# EAGLE board M_3x4._v4.1 (EAGLE 9.6.2)
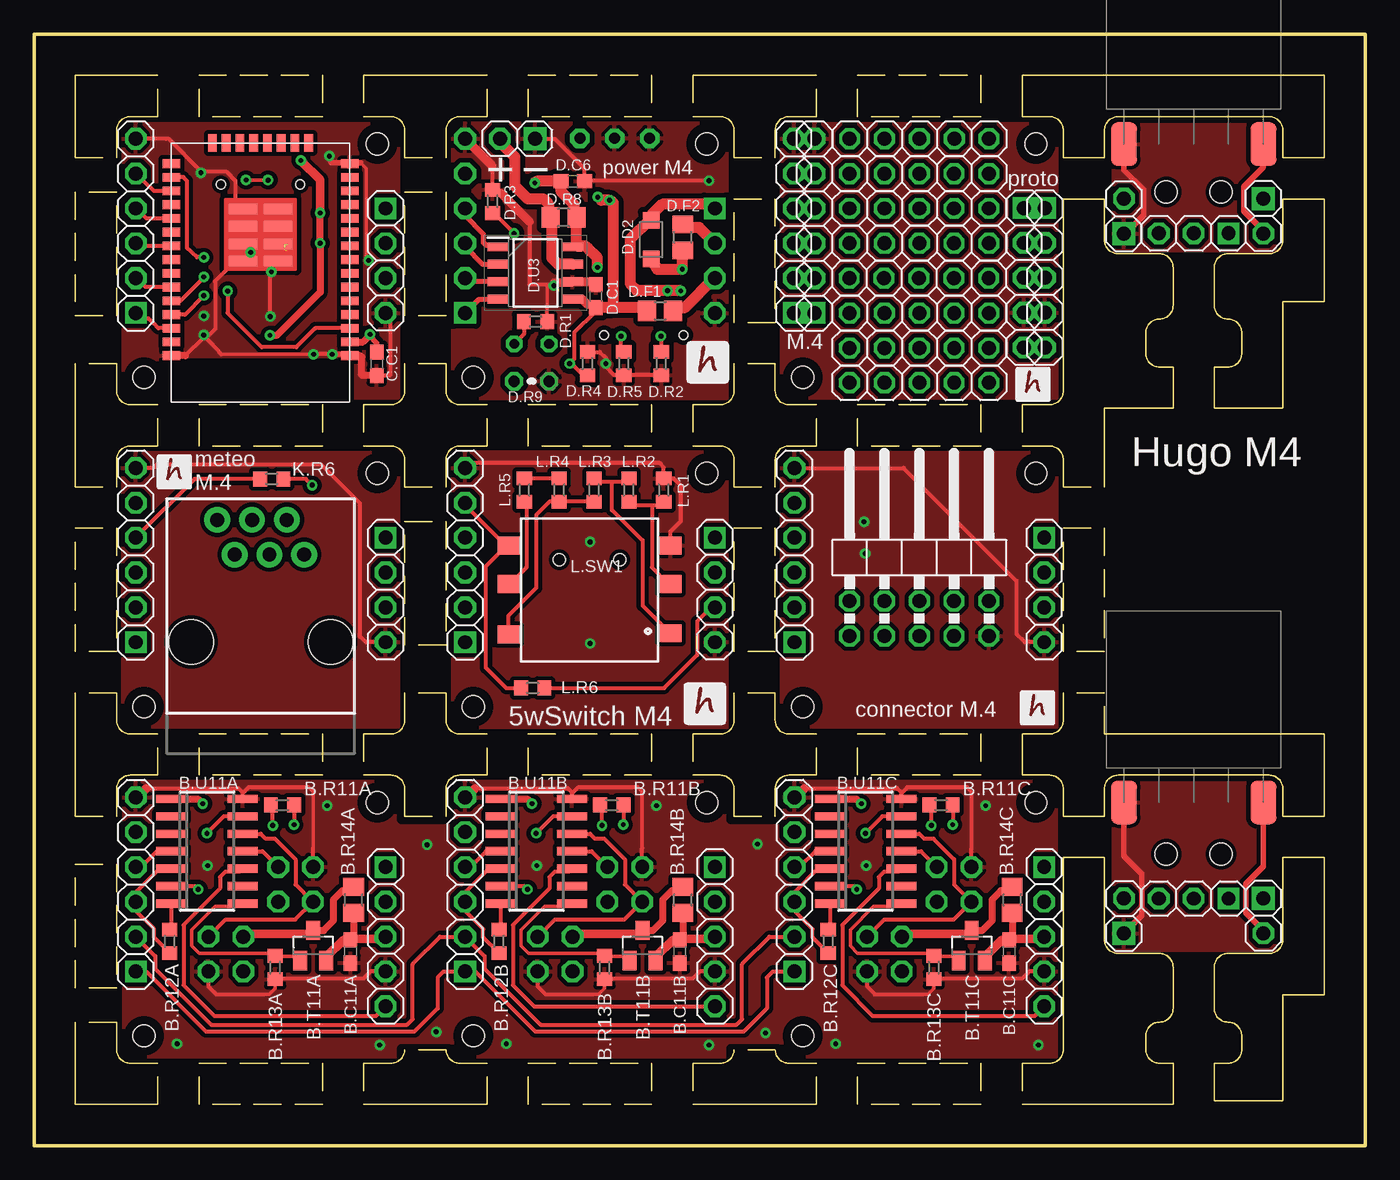
[diagram p0: board, top side]
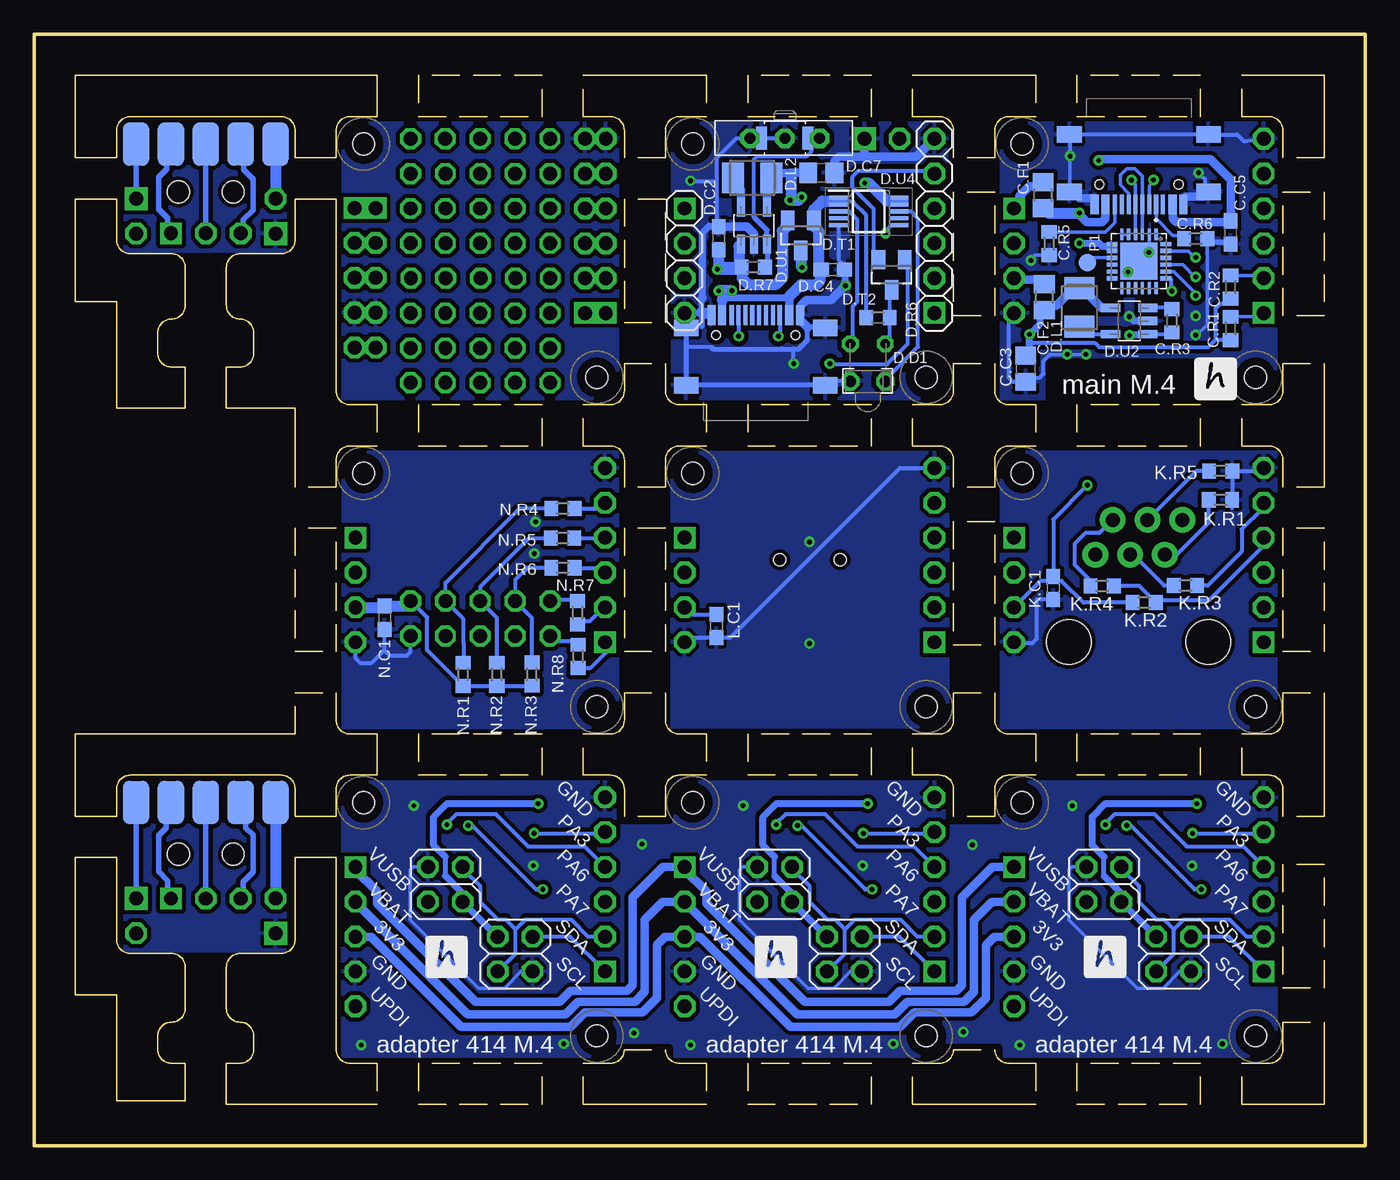
[diagram p1: board, bottom side, seen from below]

Size 97 x 81 mm. Coordinates in mm from the lower left corner, seen from the top.
Outline: 0,0 97,0 97,81 0,81 0,0
Copper layers (1*16): Top 0.035mm / dielectric 1.5mm / Bottom 0.035mm
Design rules "default *": minimum track width 10mil, minimum drill 0.35mm, track to track 6mil, track to pad 6mil, pad to pad 6mil, via to via 6mil, smd to smd 6mil, copper to edge 0mil, drill to drill 15mil, minimum pad ring 10mil, minimum via ring 8mil, stop-mask expansion 4mil, vias tented up to drill 0mil, thermal gap 10mil
Holes 1.6 mm at 32,56 49,73 73,73 56,56 25,49 8,32 8,8 25,25 32,8 49,25 56,8 73,25 32,32 49,49 82.5,69.5 86.5,69.5 73,49 56,32 82.5,21.25 86.5,21.25 8,56 25,73
tRestrict: area 48,72 to 50,74; area 31,55 to 33,57; area 72,72 to 74,74; area 55,55 to 57,57; area 24,48 to 26,50; area 7,31 to 9,33; area 24,24 to 26,26; area 7,7 to 9,9; area 48,24 to 50,26; area 31,7 to 33,9; area 72,24 to 74,26; area 55,7 to 57,9; 10 more areas
bRestrict: area 31,55 to 33,57; area 48,72 to 50,74; area 55,55 to 57,57; area 72,72 to 74,74; area 7,31 to 9,33; area 24,48 to 26,50; area 24,24 to 26,26; area 7,7 to 9,9; area 48,24 to 50,26; area 31,7 to 33,9; area 72,24 to 74,26; area 55,7 to 57,9; 10 more areas
Milling: 439 lines

## Footprints (pad centres in the part's own frame; a part is rotated, then mirrored left to right if it is on the bottom)
C0603 = smd 1.1 x 1: 1 -0.85,0; 2 0.85,0
1X06 = drill 1.016 pad 1.575 square: 1 -6.35,0 | drill 1.016 pad 1.575 octagon: 2 -3.81,0; 3 -1.27,0; 4 1.27,0; 5 3.81,0; 6 6.35,0
2X02 = drill 1.016 pad 1.575 octagon: 1 -1.27,-1.27; 2 -1.27,1.27; 3 1.27,-1.27; 4 1.27,1.27
1X05 = drill 1.016 pad 1.575 square: 1 -5.08,0 | drill 1.016 pad 1.575 octagon: 2 -2.54,0; 3 0,0; 4 2.54,0; 5 5.08,0
R0603 = smd 1 x 1.1: 1 -0.85,0; 2 0.85,0
FUSE = smd 1.3 x 1.5: 1 -0.95,0; 2 0.95,0
SO23 = smd 1 x 1.4: D 0,1.1; G -0.95,-1.1; S 0.95,-1.1
SO14 = smd 0.6 x 2.2: 1 -3.81,-2.6; 2 -2.54,-2.6; 3 -1.27,-2.6; 4 0,-2.6; 5 1.27,-2.6; 6 2.54,-2.6; 7 3.81,-2.6; 8 3.81,2.6; 9 2.54,2.6; 10 1.27,2.6; 11 0,2.6; 12 -1.27,2.6; 13 -2.54,2.6; 14 -3.81,2.6
C0805 = smd 1.3 x 1.5: 1 -0.95,0; 2 0.95,0
R0805 = smd 1.3 x 1.5: 1 -0.95,0; 2 0.95,0
TTGO-MICRO-32 = smd 1.27 x 0.635: 3V3 -6.5,5; EN -6.5,4; GND1 -6.5,6; GND2 -6.5,-8; GND3 6.5,6; IO0 6.5,-7; IO2 6.5,-8; IO4 6.5,-6; IO5 6.5,-3; IO12 -6.5,-7; IO14 -6.5,-6; IO16 6.5,-5; IO17 6.5,-4; IO18 6.5,-2; IO19 6.5,-1; IO21 6.5,1; IO22 6.5,4; IO23 6.5,5; IO25 -6.5,-3; IO26 -6.5,-4; IO27 -6.5,-5; IO32 -6.5,-1; IO33 -6.5,-2; IO34 -6.5,1; IO35 -6.5,0; NC 6.5,0; RXD0 6.5,2; TXD0 6.5,3; VN -6.5,2; VP -6.5,3 | smd 0.635 x 1.27: CLK 0.5,-9.5; CMD -0.5,-9.5; IO13 -3.5,-9.5; IO15 3.5,-9.5; SD0 1.5,-9.5; SD1 2.5,-9.5; SD2 -2.5,-9.5; SD3 -1.5,-9.5 | smd 2.032 x 0.762: GND4 -1.27,-0.889; GND5 1.27,-0.889; GND6 -1.27,-2.159; GND7 1.27,-2.159; GND8 -1.27,-3.429; GND9 -1.27,-4.699; GND10 1.27,-3.429; GND11 1.27,-4.699
LED_1.8 = drill 0.7 octagon: 1 -1.27,-0.4; 2 1.27,-0.4
SHOTKY_2.8 = smd 1.2 x 1.2: A -1.4,0; K 1.4,0
1X04 = drill 1.016 pad 1.575 square: 1 -3.81,0 | drill 1.016 pad 1.575 octagon: 2 -1.27,0; 3 1.27,0; 4 3.81,0
L3230M = smd 1.6 x 2.2: 1 -1.4,0; 2 1.4,0
1X02 = drill 1.016 pad 1.676 square: 1 -1.27,0 | drill 1.016 pad 1.575 octagon: 2 1.27,0
SWITCH = drill 0.8 pad 1.422 octagon: P$1 -2.54,0; P$2 0,0; P$3 2.54,0 | smd 0.8 x 1.7: P$4 -1.7,0; P$5 1.7,0
THERM = drill 0.813 octagon: 1 -1.27,0; 2 1.27,0
SOT32-5 = smd 0.6 x 1.4: BP 0.95,1.35; GND 0,-1.35; SHDN 0.95,-1.35; VIN -0.95,-1.35; VOUT -0.95,1.35
SOIC127P600X175-8N = smd 1.528 x 0.65: 1 -2.711,1.905; 2 -2.711,0.635; 3 -2.711,-0.635; 4 -2.711,-1.905; 5 2.711,-1.905; 6 2.711,-0.635; 7 2.711,0.635; 8 2.711,1.905
SOP50P490X110-10N = smd 1.4 x 0.3: 1 -2.2,1; 2 -2.2,0.5; 3 -2.2,0; 4 -2.2,-0.5; 5 -2.2,-1; 6 2.2,-1; 7 2.2,-0.5; 8 2.2,0; 9 2.2,0.5; 10 2.2,1
RJ11-6 = drill 1.016 pad 1.88: 1 -3.175,8.89; 2 -1.905,6.35; 3 -0.635,8.89; 4 0.635,6.35; 5 1.905,8.89; 6 3.175,6.35 | hole 3.251: -5.08,0; 5.08,0
1X03 = drill 1.016 pad 1.575 square: 1 -2.54,0 | drill 1.016 pad 1.575 octagon: 2 0,0; 3 2.54,0
2X05/90 = drill 1.016 octagon: 1 -5.08,-6.35; 2 -5.08,-3.81; 3 -2.54,-6.35; 4 -2.54,-3.81; 5 0,-6.35; 6 0,-3.81; 7 2.54,-6.35; 8 2.54,-3.81; 9 5.08,-6.35; 10 5.08,-3.81
5_WAY_SWITCH = smd 1.6 x 1.3: 1 -6,3; 2 -6,0.2; 3 -6,-3.5; 4 5.8,3; 5 5.8,0.2; 6 5.8,-3.4 | hole 0.9: 2.1,1.95; -2.3,1.95
B1,27 = smd 1.27 x 1.27: TP 0,0
QFN50P400X400X80-25N = smd 0.81 x 0.26: 1 -1.955,1.25; 2 -1.955,0.75; 3 -1.955,0.25; 4 -1.955,-0.25; 5 -1.955,-0.75; 6 -1.955,-1.25; 13 1.955,-1.25; 14 1.955,-0.75; 15 1.955,-0.25; 16 1.955,0.25; 17 1.955,0.75; 18 1.955,1.25 | smd 0.26 x 0.81: 7 -1.25,-1.955; 8 -0.75,-1.955; 9 -0.25,-1.955; 10 0.25,-1.955; 11 0.75,-1.955; 12 1.25,-1.955; 19 1.25,1.955; 20 0.75,1.955; 21 0.25,1.955; 22 -0.25,1.955; 23 -0.75,1.955; 24 -1.25,1.955 | smd 2.68 x 2.68: 25 0,0
USB-C = smd 0.6 x 1.45: A1B12 -3.235,3.825; A4B9 -2.46,3.825; B1A12 3.215,3.825; B4A9 2.44,3.825 | smd 0.3 x 1.45: A5 -1.26,3.825; A6 -0.26,3.825; A7 0.24,3.825; A8 1.24,3.825; B5 1.74,3.825; B6 0.74,3.825; B7 -0.76,3.825; B8 -1.76,3.825 | smd 1.8 x 1.2: SH1 -5.08,2.91; SH2 -5.08,-1.27; SH3 5.06,-1.27; SH4 5.06,2.91 | hole 0.65: 2.88,2.38; -2.9,2.38
1X5_AUTO = drill 1.016 octagon: 1 -5.08,0; 2 -2.54,0; 3 0,0; 4 2.54,0; 5 5.08,0
7PIN_CONNECTOR = smd 3.175 x 1.905: 1 0,5.08; 7 0,-5.08 | smd 3.175 x 1.905 bottom: 2 0,5.08; 3 0,2.54; 4 0,0; 5 0,-2.54; 6 0,-5.08

## Placement (x,y rotation side)
B.C11A  100n  [C0603]  23.04,14.15 270 top
B.C11B  100n  [C0603]  47.04,14.15 270 top
B.C11C  100n  [C0603]  71.04,14.15 270 top
B.J1  [1X06]  31.4,19.04 90 top
B.J2  [2X02]  37.96,13.96 270 bottom
B.J3  [2X02]  43.04,19.04 270 bottom
B.J4  [1X05]  49.6,15.23 270 top
B.J5  [1X06]  55.4,19.04 90 top
B.J6  [2X02]  61.96,13.96 270 bottom
B.J7  [2X02]  67.04,19.04 270 bottom
B.J8  [1X05]  73.6,15.23 270 top
B.J11  [1X05]  25.6,15.23 270 top
B.J12  [1X06]  7.4,19.04 90 top
B.J13  [2X02]  13.96,13.96 270 bottom
B.J14  [2X02]  19.04,19.04 270 bottom
B.R11A  alt RX 0R  [R0603]  18.09,24.82 180 top
B.R11B  alt RX 0R  [R0603]  42.09,24.82 180 top
B.R11C  alt RX 0R  [R0603]  66.09,24.82 180 top
B.R12A  alt TX 0R  [R0603]  9.86,14.89 90 top
B.R12B  alt TX 0R  [R0603]  33.86,14.89 90 top
B.R12C  alt TX 0R  [R0603]  57.86,14.89 90 top
B.R13A  100k  [R0603]  17.56,12.98 270 top
B.R13B  100k  [R0603]  41.56,12.98 270 top
B.R13C  100k  [R0603]  65.56,12.98 270 top
B.R14A  alt fuse or 0R  [FUSE]  23.27,17.9 90 top
B.R14B  alt fuse or 0R  [FUSE]  47.27,17.9 90 top
B.R14C  alt fuse or 0R  [FUSE]  71.27,17.9 90 top
B.T11A  NX3008  [SO23]  20.33,14.59 0 top
B.T11B  NX3008  [SO23]  44.33,14.59 0 top
B.T11C  NX3008  [SO23]  68.33,14.59 0 top
B.U11A  AT414  [SO14]  12.59,21.45 270 top
B.U11B  AT414  [SO14]  36.59,21.45 270 top
B.U11C  AT414  [SO14]  60.59,21.45 270 top
C.C1  100n  [C0603]  24.96,56.98 270 top
C.C3  22u  [C0805]  24.75,56.62 270 bottom
C.C5  1u  [C0603]  9.81,66.55 90 bottom
C.F1  0.5A  [R0805]  23.48,69.28 90 bottom
C.F2  0.5A  [R0805]  23.38,61.85 90 bottom
C.J2  [1X06]  7.4,67.04 90 top
C.R1  2k2  [R0603]  9.81,59.56 270 bottom
C.R2  2k2  [R0603]  9.81,62.58 270 bottom
C.R3  100k  [R0603]  14.08,60.12 270 bottom
C.R5  5K1  [R0603]  23.03,65.76 90 bottom
C.R6  5k1  [R0603]  12.35,66.11 180 bottom
C.U1  TTGO-MICRO-32  [TTGO-MICRO-32]  16.49,63.58 180 top
D.C1  100n  [C0603]  40.92,61.92 270 top
D.C2  4u7  [C0603]  47.12,66.14 270 bottom
D.C4  4u7  [C0603]  38.8,63.85 180 bottom
D.C6  4u7  [C0603]  39.25,70.29 180 top
D.C7  10u  [C0805]  39.64,70.9 180 bottom
D.D1  LED_1.8_FLIPPED  [LED_1.8]  36.25,58.05 180 bottom
D.D2  SHOTKY_2.8  [SHOTKY_2.8]  44.96,66.04 270 top
D.F1  0.5A  [R0805]  45.61,60.85 0 top
D.F2  1.1A  [R0805]  47.26,66.2 90 top
D.J2  [1X06]  31.4,67.04 90 bottom
D.J3  [1X04]  49.6,64.5 270 bottom
D.L1  2u2  [L3230M]  20.83,61.09 90 bottom
D.L2  2u2  [L3230M]  44.68,70.54 0 bottom
D.LIPOL  [1X02]  35.21,73.39 180 top
D.ON/OFF/RESET  SWITCH  [SWITCH]  42.3,73.42 0 bottom
D.R1  4k7  [R0603]  36.53,60.05 180 top
D.R2  5k1  [R0603]  45.7,57 270 top
D.R3  I=1/R (4k7 for 213mA, 2k2 for455mA )  [R0603]  33.4,68.81 270 top
D.R4  100k  [R0603]  40.31,57 90 top
D.R5  5k1  [R0603]  42.96,57 270 top
D.R6  3k3  [R0603]  35.51,60.35 180 bottom
D.R7  390k  [R0603]  44.6,64.03 0 bottom
D.R8  0.1  [R0805]  38.58,67.64 180 top
D.R9  TERM_10K  [THERM]  36.25,55.71 180 top
D.T1  FDV304  [SO23]  41.13,66.34 180 bottom
D.T2  NX3008  [SO23]  34.52,63.47 180 bottom
D.U1  LM3671_3.3  [SOT32-5]  44.54,67.05 0 bottom
D.U2  LM3671_3.3  [SOT32-5]  17.2,60.11 90 bottom
D.U3  INA219AIDR  [SOIC127P600X175-8N]  36.53,63.6 0 top
D.U4  MCP73833-AMI_UN  [SOP50P490X110-10N]  36.17,68.09 0 bottom
G.J1  [1X06]  31.4,43.04 90 top
G.J2  [1X04]  49.6,40.5 270 top
I.J1  [1X04]  73.6,40.5 270 top
I.J3  [1X04]  25.6,40.5 270 top
J1  RJ11  [RJ11-6]  16.5,36.72 0 top
JP1  [1X04]  25.6,64.5 270 top
JP2  [1X06]  55.35,67.04 90 top
JP3  [1X06]  56.87,67.04 90 top
JP4  [1X05]  72.13,63.26 270 top
JP5  [1X06]  7.4,43.04 90 top
JP6  [1X03]  84.5,66.5 180 top
JP7  [1X02]  79.42,67.75 90 top
JP8  [1X02]  89.58,67.75 270 top
JP9  [1X06]  55.4,43.04 90 top
JP10  [2X05/90]  64.5,43.5 0 top
JP11  [1X05]  73.65,63.26 270 top
JP12  [1X03]  84.5,18 180 top
JP13  [1X02]  79.42,16.75 90 top
JP14  [1X02]  89.58,16.75 270 top
K.C1  100n  [C0603]  22.74,40.64 270 bottom
K.R1  1k  [R0603]  10.55,47.07 180 bottom
K.R2  4k7  [R0603]  16.11,39.58 0 bottom
K.R3  1k  [R0603]  13.1,40.82 180 bottom
K.R4  1k  [R0603]  19.17,40.8 180 bottom
K.R5  1k  [R0603]  10.54,49.18 180 bottom
K.R6  4k7  [R0603]  17.3,48.59 180 top
L.C1  100n  [C0603]  47.27,37.87 90 bottom
L.R1  1k  [R0603]  45.88,47.78 90 top
L.R2  1k  [R0603]  43.34,47.78 270 top
L.R3  2k2  [R0603]  40.8,47.78 90 top
L.R4  2k2  [R0603]  38.26,47.78 270 top
L.R5  2k2  [R0603]  35.72,47.78 270 top
L.R6  2k2  [R0603]  36.32,33.35 0 top
L.SW1  5_WAY_SWITCH  [5_WAY_SWITCH]  40.57,40.74 0 top
N.C1  100n  [C0603]  71.46,38.47 270 bottom
N.R1  4k7  [R0603]  65.75,34.35 90 bottom
N.R2  4k7  [R0603]  63.29,34.35 90 bottom
N.R3  4k7  [R0603]  60.74,34.37 90 bottom
N.R4  4k7  [R0603]  58.47,46.43 180 bottom
N.R5  4k7  [R0603]  58.5,44.27 180 bottom
N.R6  4k7  [R0603]  58.47,42.12 180 bottom
N.R7  4k7  [R0603]  57.4,38.84 90 bottom
N.R8  4k7  [R0603]  57.38,35.66 90 bottom
P1  TPB1,27  [B1,27]  20.24,64.37 0 bottom
U1  CP2104-F03-GM  [QFN50P400X400X80-25N]  16.49,64.46 270 bottom
U$1  USB-C  [USB-C]  16.5,72.43 180 bottom
U$2  USB-C  [USB-C]  44.41,56.7 0 bottom
U$3  PINHD-1X5_AUTO  [1X5_AUTO]  64.51,73.39 0 top
U$4  PINHD-1X5_AUTO  [1X5_AUTO]  64.5,70.85 0 top
U$5  PINHD-1X5_AUTO  [1X5_AUTO]  64.5,68.31 0 top
U$6  PINHD-1X5_AUTO  [1X5_AUTO]  64.5,65.77 0 top
U$7  PINHD-1X5_AUTO  [1X5_AUTO]  64.47,63.23 0 top
U$8  PINHD-1X5_AUTO  [1X5_AUTO]  64.5,60.69 0 top
U$9  PINHD-1X5_AUTO  [1X5_AUTO]  64.5,58.14 0 top
U$10  PINHD-1X5_AUTO  [1X5_AUTO]  64.5,55.6 0 top
U$11  7PIN_CONNECTOR  [7PIN_CONNECTOR]  84.5,73 270 top
U$12  7PIN_CONNECTOR  [7PIN_CONNECTOR]  84.5,25 270 top

## Library data of the parts
B.C11A B.C11B B.C11C C.C1 C.C3 C.C5 D.C1 D.C2 D.C4 D.C6 D.C7 K.C1 L.C1 N.C1 = rcl; SPICEPREFIX: C
B.J1-B.J8 B.J11-B.J14 C.J2 D.J2 D.J3 D.LIPOL G.J1 G.J2 I.J1 I.J3 JP1-JP14 U$3-U$10 = pinhead2
B.R11A B.R11B B.R11C B.R12A B.R12B B.R12C B.R13A B.R13B B.R13C C.F1 C.F2 C.R1-C.R3 C.R5 C.R6 D.F1 D.F2 D.R1-D.R8 K.R1-K.R6 L.R1-L.R6 N.R1-N.R8 = rcl; SPICEPREFIX: R
B.R14A B.R14B B.R14C B.T11A B.T11B B.T11C C.U1 D.D1 D.D2 D.ON/OFF/RESET D.R9 D.T1 D.T2 L.SW1 U$1 U$2 U$11 U$12 = hugo
B.U11A B.U11B B.U11C = atmel
D.L1 D.L2 = rcl; SPICEPREFIX: L
D.U1 D.U2 = !stavebnice03
D.U3 = SamacSys_Parts; DESCRIPTION: 26-V, Bidirectional, Zero-Drift, High-Side, I2C Out Current/Power Monitor; HEIGHT: 1.75mm; MANUFACTURER_NAME: Texas Instruments; MANUFACTURER_PART_NUMBER: INA219AIDR; MOUSER_PART_NUMBER: 595-INA219AIDR; MOUSER_PRICE-STOCK: https://www.mouser.co.uk/ProductDetail/Texas-Instruments/INA219AIDR?qs=XGzIaZb%2FFYIE5YcOHTnKDA%3D%3D
D.U4 = SamacSys_Parts; DESCRIPTION: Microchip MCP73833-AMI/UN, Battery Charge Controller Lithium-Ion, Lithium-Polymer, 10-Pin MSOP; HEIGHT: 1.1mm; MANUFACTURER_NAME: Microchip; MANUFACTURER_PART_NUMBER: MCP73833-AMI/UN; MOUSER_PART_NUMBER: 579-MCP73833-AMI/UN; MOUSER_PRICE-STOCK: https://www.mouser.co.uk/ProductDetail/Microchip-Technology/MCP73833-AMI-UN?qs=Fxu3fLyJv8fd%2FGnsUSC9lg%3D%3D
J1 = SparkFun-Connectors; PROD_ID: CONN-08590; SF_ID: PRT-00132
P1 = testpad
U1 = CP2104; AVAILABILITY: Unavailable; DESCRIPTION: USB Bridge, USB to UART USB 2.0 UART Interface 24-QFN (4x4); MF: Silicon Labs; MP: CP2104; PACKAGE: QFN-24 Silicon Labs; PRICE: None

## Nets
3V3F: D.F1.2 D.J3.3
GND: C.C1.2 C.C3.2 C.C5.1 C.J2.6 C.R5.1 C.R6.1 C.U1.GND1 C.U1.GND2 C.U1.GND3 C.U1.GND4 C.U1.GND5 C.U1.GND6 C.U1.GND7 C.U1.GND8 C.U1.GND9 C.U1.GND10 C.U1.GND11 D.U2.GND JP1.4 U1.2 U1.25 U$1.A1B12 U$1.B1A12 U$1.SH1 U$1.SH2 U$1.SH3 U$1.SH4
GND1: D.C1.1 D.C2.1 D.C4.1 D.C6.1 D.C7.1 D.J2.6 D.J3.4 D.LIPOL.1 D.ON/OFF/RESET.P$1 D.ON/OFF/RESET.P$2 D.ON/OFF/RESET.P$4 D.R1.1 D.R2.2 D.R3.1 D.R4.2 D.R5.2 D.R9.1 D.U1.GND D.U3.6 D.U4.5 U$2.A1B12 U$2.B1A12 U$2.SH1 U$2.SH2 U$2.SH3 U$2.SH4
GND2: JP2.6 JP3.6 JP4.4 JP11.4
GND3: G.J1.6 G.J2.4 L.C1.1 L.R1.2 L.SW1.4
GND4: I.J3.4 JP5.6 K.C1.2 K.R1.1 K.R5.1
GND5: JP7.1 U$11.7
GND6: B.C11A.2 B.C11B.2 B.C11C.2 B.J1.6 B.J2.4 B.J3.1 B.J4.4 B.J5.6 B.J6.4 B.J7.1 B.J8.4 B.J11.4 B.J12.6 B.J13.4 B.J14.1 B.R13A.2 B.R13B.2 B.R13C.2 B.U11A.14 B.U11B.14 B.U11C.14
GND7: I.J1.4 JP9.6 JP10.9 N.C1.2
GND8: JP13.1 U$12.7
IN+: D.LIPOL.2 D.R8.2 D.U3.7
IN-: D.C6.2 D.R8.1 D.T1.D D.U3.8 D.U4.9 D.U4.10
N$1: U1.4 U$1.A7 U$1.B7
N$2: U1.3 U$1.A6 U$1.B6
N$3: C.R6.2 U$1.A5
N$4: C.R5.2 U$1.B5
N$5: C.F2.2 JP1.3
N$6: C.F1.2 JP1.1
N$7: P1.TP U1.9
N$8: U1.5 U1.6
N$9: D.L2.1 D.U1.VOUT
N$10: D.L1.1 D.U2.VOUT
N$11: C.R3.1 D.U2.SHDN
N$12: C.J2.5 C.U1.IO4
N$13: C.J2.4 C.U1.IO17
N$14: C.J2.3 C.U1.IO18
N$15: D.ON/OFF/RESET.P$3 D.ON/OFF/RESET.P$5 D.R7.2 D.U1.SHDN
N$16: D.R5.1 U$2.B5
N$17: D.R2.1 U$2.A5
N$18: D.R3.2 D.U4.6
N$19: D.R9.2 D.U4.8
N$20: D.J2.5 D.T2.S
N$21: JP2.5 JP3.5
N$22: JP2.4 JP3.4
N$24: JP2.3 JP3.3
N$25: JP2.2 JP3.2
N$27: JP2.1 JP3.1
N$28: JP4.5 JP11.5
N$29: JP4.2 JP11.2
N$30: JP4.1 JP11.1
N$31: JP4.3 JP11.3
N$32: L.R1.1 L.R2.2 L.SW1.5
N$33: L.R2.1 L.R3.2 L.SW1.6
N$34: L.R3.1 L.R4.2 L.SW1.3
N$35: L.R5.2 L.SW1.2
N$36: G.J1.5 L.R6.1 L.SW1.1
N$37: L.R4.1 L.R5.1
N$38: JP5.5 K.R3.1
N$39: JP5.4 K.R2.2 K.R4.1 K.R6.2
N$40: J1.5 K.R4.2
N$41: J1.4 K.R3.2
N$42: J1.3 K.R5.2
N$43: J1.2 K.R1.2
N$44: B.R12A.2 B.U11A.7
N$45: B.R11A.2 B.U11A.6
N$46: B.R13A.1 B.T11A.G B.U11A.8
N$47: B.R12C.2 B.U11C.7
N$48: B.C11A.1 B.C11B.1 B.C11C.1 B.J4.3 B.J8.3 B.J11.3 B.R14A.1 B.R14B.1 B.R14C.1 B.T11A.S B.T11B.S B.T11C.S
N$49: B.R12B.2 B.U11B.7
N$50: B.R11B.2 B.U11B.6
N$51: B.R13B.1 B.T11B.G B.U11B.8
N$52: B.R11C.2 B.U11C.6
N$53: B.R13C.1 B.T11C.G B.U11C.8
N$54: JP8.1 U$11.2
N$55: JP8.2 U$11.1
N$56: JP6.2 U$11.4
N$57: JP6.3 U$11.5
N$58: JP6.1 U$11.3
N$59: JP10.8 N.R1.2 N.R4.2
N$60: JP10.6 N.R2.2 N.R5.2
N$61: JP10.2 N.R7.2
N$62: JP9.5 N.R4.1
N$63: JP9.4 N.R5.1
N$64: JP9.3 N.R6.1
N$65: JP9.2 N.R7.1
N$66: JP9.1 N.R8.1
N$67: JP10.1 N.R8.2
N$68: JP10.4 N.R3.2 N.R6.2
N$69: JP14.1 U$12.2
N$70: JP14.2 U$12.1
N$71: JP12.2 U$12.4
N$72: JP12.3 U$12.5
N$73: JP12.1 U$12.3
PA1: B.J12.5 B.U11A.13
PA2: B.J12.4 B.R11A.1 B.U11A.4
PA3: D.D1.1 D.R1.2 D.R6.1 D.T2.D
PA4: B.J12.3 B.R12A.1 B.U11A.5
PA5: B.J1.5 B.U11B.13
PA6: D.J2.4 D.U3.1
PA7: D.J2.3 D.U3.2
PA8: B.J1.4 B.R11B.1 B.U11B.4
PA9: B.J1.3 B.R12B.1 B.U11B.5
PA10: B.J5.5 B.U11C.13
PA11: B.J5.4 B.R11C.1 B.U11C.4
PA12: B.J5.3 B.R12C.1 B.U11C.5
PROG: C.U1.IO0 U1.23
RESET: C.U1.EN U1.19
RX: C.U1.TXD0 U1.20
SCL: C.J2.1 C.R1.1 C.U1.IO22
SCL1: D.J2.1 D.U3.4
SCL2: B.J1.1 B.J2.2 B.J3.3 B.J5.1 B.J6.2 B.J7.3 B.J12.1 B.J13.2 B.J14.3 B.U11A.12 B.U11B.12 B.U11C.12
SDA: C.J2.2 C.R2.1 C.U1.IO21
SDA1: D.J2.2 D.U3.3
SDA2: B.J1.2 B.J2.3 B.J3.2 B.J5.2 B.J6.3 B.J7.2 B.J12.2 B.J13.3 B.J14.2 B.U11A.11 B.U11B.11 B.U11C.11
STAT1: D.D1.2 D.U4.3
TX: C.U1.RXD0 U1.21
UPDI: B.J11.5 B.U11A.10
UPDI1: B.J4.5 B.U11B.10
UPDI2: B.J8.5 B.U11C.10
VBAT: B.J4.2 B.J8.2 B.J11.2
VBATF: D.F2.2 D.J3.2
VCC: C.C1.1 C.C3.1 C.F2.1 C.R1.2 C.R2.2 C.U1.3V3 D.L1.2 D.U2.BP
VCC1: D.C1.2 D.C7.2 D.F1.1 D.L2.2 D.R4.1 D.T2.G D.U1.BP D.U3.5
VCC2: G.J2.3 L.C1.2 L.R6.2
VCC3: I.J3.3 K.C1.1 K.R2.1 K.R6.1
VCC4: B.J13.1 B.J14.4 B.R14A.2 B.T11A.D B.U11A.1
VCC5: B.J2.1 B.J3.4 B.R14B.2 B.T11B.D B.U11B.1
VCC6: B.J6.1 B.J7.4 B.R14C.2 B.T11C.D B.U11C.1
VCC7: JP7.2 U$11.6
VCC8: I.J1.3 JP10.10 N.C1.1 N.R1.1 N.R2.1 N.R3.1
VCC9: JP13.2 U$12.6
VMOT: D.C2.2 D.D2.K D.F2.1 D.R7.1 D.T1.S D.U1.VIN
VUSB: C.C5.2 C.F1.1 C.R3.2 D.U2.VIN U1.7 U1.8 U$1.A4B9 U$1.B4A9
VUSB1: D.C4.2 D.D2.A D.J3.1 D.R6.2 D.T1.G D.U4.1 D.U4.2 U$2.A4B9 U$2.B4A9
VUSB2: B.J4.1 B.J8.1 B.J11.1

## Tracks (layer width: path | path; a pad name or v marks a point on that pad's centre or on a via)
3V3F
  Top 0.813: D.F1.2 46.77,61.05 47.37,61.05 49.55,63.23 D.J3.3
GND  (via drill 0.35)
  Top 0.254: 23.79,71.63 24.17,71.24 24.17,64.78 24.37,64.59 v24.37,64.52 | 15.17,64.21 15.42,64.47 15.8,64.84 16.47,64.84 17.1,64.21 | v17.2,60.43
  Top 0.305: 21.65,71.63 21.51,71.77 v21.51,72.12 21.51,71.97 | 22.94,71.63 C.U1.GND2 | v12.35,59.09 12.27,58.82 11.02,57.57 | C.U1.GND3 | 12.23,71 v12.14,70.91 | v12.14,70.91 12.14,71.04 9.8,73.38 9.61,73.39 C.J2.6 | 24.96,56.15 C.C1.2 25.91,56.13 25.91,60.38 JP1.4 | C.U1.GND1 22.88,57.46 22.85,57.46 22.75,57.57 23.18,57.55 | v12.35,59.09 13.65,57.66 v20.35,57.68 20.36,57.67 20.5,57.68 v21.71,57.68 | v12.14,70.91 12.21,70.97 14.01,70.97 14.65,70.33 14.65,68.79 15.73,67.71 15.73,66.76 15.73,65.57 | 15.73,65.57 15.73,65.43 15.73,64.13 17.2,65.6 v17.2,60.43 | 18.32,64.26 17.15,64.26 17.1,64.21 15.17,64.21 | 15.42,64.47 C.U1.GND5 | v17.2,60.43 17.05,60.62 | 15.73,65.57 13.17,63.01 13.17,59.52 12.73,59.09 v12.35,59.09
  Top 0.406: 21.65,71.63 22.94,71.63 23.79,71.63 | 23.18,57.55 22.39,57.68 v21.71,57.68
  Top 0.508: 11.02,57.57 C.U1.GND3 | C.C1.2 23.86,56.13 23.86,57.48 23.76,57.58 C.U1.GND1 22.95,57.61 | C.U1.GND10 15.48,67 15.73,66.76 | C.U1.GND7 15.42,65.73 15.73,65.43
  Bottom 0.254: v12.35,59.09 11.52,59.79 11.52,66.03 C.R6.1 11.35,65.86 | v21.51,72.12 21.51,69.57 U$1.SH4 | v24.37,64.52 24.37,64.63 24.09,64.91 C.R5.1 | D.U2.GND 15.88,60.14 | U1.2 15.75,65.4 15.77,65.38 v15.77,65.1 15.86,65.1 U1.25 | C.C5.1 10.07,65.86
  Bottom 0.305: C.C3.2 24.68,55.67 | 21.5,72.12 v21.51,72.12 | U$1.A1B12 13.27,69.01 13.24,69.01 | 13.09,69.18 13.09,69.01 13.24,69.01 | 13.24,69.01 13.24,68.83 | v12.14,70.91 11.68,70.44 11.68,69.4 | v21.51,72.12 21.51,73.65 U$1.SH3 U$1.SH2 9.34,73.7 8.84,73.2 C.J2.6 | C.C3.2 24.43,55.99 23.72,55.99 23.45,56.26 23.45,57.18 22.96,57.66 v20.35,57.68 | 21.32,69.52 U$1.SH4 21.29,69.52 20.84,69.06 | U$1.SH1 11.76,69.18 | 16.7,64.66 U1.25 | 15.71,65.46 16.46,64.71 | JP1.4 26,60.29 26,55.96 25.71,55.67 C.C3.2 | 21.56,72.07 v21.51,72.12 | C.C5.1 9.72,65.7 9.65,65.63 | U$1.B1A12 19.71,69.05 19.73,69.06
  Bottom 0.406: 11.35,65.86 10.07,65.86
  Bottom 0.508: D.U2.GND 15.87,60.12 16.87,60.12 17.06,60.43 v17.2,60.43 | U1.25 16.75,64.21 17.1,64.21
  Bottom 0.61: 19.73,69.06 20.84,69.06 | 11.76,69.18 13.09,69.18
  other vias: 17.28,63.68 12.35,60.47
  pour Top (isolate 0.305): 6.5,54.5 6.5,74.5 26.5,74.5 26.5,54.5
  pour Bottom (isolate 0.305): 6.5,74.5 26.5,74.5 26.5,54.5 6.5,54.5
GND1  (via drill 0.35)
  Top 0.254: D.R1.1 37.38,62.73 37.39,62.74
  Top 0.305: D.U3.6 39.23,62.95 | D.C1.1 41.16,63.01 | D.R2.2 45.7,56.17 D.R5.2 42.25,56.17 41.65,56.77 v41.65,57 41.65,57.4 41.21,57.85 D.R4.2 | D.LIPOL.1 37.91,73.39 40.1,71.2 D.C6.1 40.15,70.33 v49.18,70.33 | D.J2.6 | 33.37,71.42 33.37,69.69 D.R3.1 33.65,69.41 34.02,69.41 | 37.88,62.89 37.98,62.79 v37.87,62.68 37.82,62.74 37.39,62.74 36.08,62.74 36.08,67.35
  Top 0.61: D.C1.1 40.73,62.97 D.U3.6 39.16,62.89 37.88,62.89 | 33.37,71.42 D.J2.6 | 34.02,69.41 36.08,67.35
  Bottom 0.254: 36.15,71.97 36.03,72.08 | 38.46,67.09 D.U4.5 | D.C2.1 47.15,67.03 | 47.29,66.91 47.3,66.92
  Bottom 0.305: 47.68,58.2 49.49,58.2 49.49,58.19 | 47.27,70.28 47.27,71.97 45.81,73.42 D.ON/OFF/RESET.P$1 | 47.27,70.28 47.27,66.93 | 46.7,66.97 47.05,67.32 47.12,67.25 D.C2.1 47.23,66.99 47.3,66.92 | 36.75,73.66 D.LIPOL.1 | 41.65,57.13 v41.65,57 | v41.65,57 41.63,56.97 | D.ON/OFF/RESET.P$1 D.ON/OFF/RESET.P$2 | D.ON/OFF/RESET.P$4 D.ON/OFF/RESET.P$1 | v49.18,70.33 49.13,70.28 47.27,70.28 | D.U4.5 38.38,64.57 37.95,64.15 | v41.65,57 41.65,58.07 | D.R9.1 39.07,55.71 U$2.SH3
  Bottom 0.356: 36.48,71.96 D.LIPOL.1 | U$2.SH3 U$2.SH2 49.49,58.19 U$2.SH1 | 41.2,60.2 U$2.B1A12 | 47.68,58.2 47.55,58.07 41.65,58.07 | 42.52,58.07 41.29,58.07 40.65,58.71 40.65,59.45 40.71,59.51 40.61,59.61 40.51,59.71 39.45,59.71 U$2.SH4
  Bottom 0.406: 48.51,60.85 48.37,60.98 48.37,61.71 | 48.51,60.85 48.66,60.69 | U$2.A1B12 47.82,60.7 47.84,60.69 | 48.66,60.69 D.J3.4 49.6,59.72 | 48.66,60.69 48.31,60.69 | 48.51,60.85 48.34,60.68 48.34,59.72
  Bottom 0.508: D.C4.1 37.95,64.15 | 37.95,64.15 D.C4.1 | 37.91,62.65 v37.87,62.68 37.87,63.92 D.C4.1 | 48.29,61.79 48.29,66.54 47.81,67.03 47.15,67.03
  Bottom 0.61: D.LIPOL.1 36.48,72.08 36.03,72.08 32.71,72.08 D.J2.6 | D.U1.GND 44.54,66.47 45.06,66.99 46.67,66.99 46.7,66.97 | 47.27,66.93 47.29,66.91 | 47.3,66.92 47.21,66.93 | 48.37,61.71 48.29,61.79 | 40.61,59.61 41.2,60.2 | 38.81,59.84 39.12,59.84 U$2.SH4 39.22,59.74 | 49.6,59.72 U$2.SH1 | D.C7.1 38.69,71.77 38.38,72.08 36.51,72.08 | v37.87,62.68 38.94,61.62 40.72,61.62 41.15,61.19 41.15,60.58 U$2.B1A12
  Bottom 0.813: 38.02,63.92 D.C4.1 | 48.31,60.69 47.84,60.69
  pour Top (isolate 0.356): 30.5,74.5 30.5,54.5 50.5,54.5 50.5,74.5
  pour Bottom (isolate 0.356, rank 3): 30.5,74.5 50.5,74.5 50.5,54.5 30.5,54.5
GND2
  pour Top (isolate 0.305): 54.5,74.5 74.5,74.5 74.5,54.5 54.5,54.5
  pour Bottom (isolate 0.305): 54.5,74.5 74.5,74.5 74.5,54.5 54.5,54.5
GND3  (via drill 0.35)
  Top 0.305: L.SW1.4 46.37,44.77 47.12,45.52 47.12,48.11 46.6,48.63 L.R1.2 45.88,49.46 45.6,49.74 31.75,49.74 G.J1.6
  Bottom 0.305: G.J2.4 49.27,37.02 L.C1.1 46.27,37.02 33.9,49.39 G.J1.6
  other vias: 40.5,44 40.5,36.6
  pour Top (isolate 0.305): 30.5,50.5 30.5,30.5 50.5,30.5 50.5,50.5
  pour Bottom (isolate 0.305): 30.5,50.5 30.5,30.5 50.5,30.5 50.5,50.5
GND4
  Top 0.305: I.J3.4 24.15,36.69 23.74,37.1 23.74,46.8 20.89,49.64 8.95,49.64 8.7,49.39 JP5.6
  Bottom 0.305: K.C1.2 23.95,39.79 23.95,36.92 24.25,36.62 25.53,36.62 I.J3.4 | JP5.6 7.61,49.18 K.R5.1 9.69,47.08 K.R1.1 9.7,46.47
  pour Top (isolate 0.305): 6.47,50.5 26.5,50.5 26.5,30.5 6.47,30.5
  pour Bottom (isolate 0.305): 6.5,50.5 26.5,50.5 26.5,30.5 6.5,30.5
GND5
  Top 0.406: U$11.7 79.42,71.11 80.87,69.66 80.87,67.83 79.52,66.48 JP7.1
  pour Top (isolate 0.305): 78.7,74.42 90.38,74.42 90.38,65.25 78.7,65.25
  pour Bottom (isolate 0.305): 78.72,74.42 90.38,74.42 90.38,65.25 78.72,65.25
GND6  (via drill 0.35)
  Top 0.254: 17.58,12.16 B.R13A.2 17.56,11.45 17.12,11.01 16.71,11.01 | 20.31,21.67 20.31,25.79 19.98,26.12 | 41.58,12.16 B.R13B.2 41.56,11.45 41.12,11.01 40.71,11.01 | 44.31,21.67 44.31,25.79 43.98,26.12 | 65.58,12.16 B.R13C.2 65.56,11.45 65.12,11.01 64.71,11.01 | 68.31,21.67 68.31,25.79 67.98,26.12
  Top 0.305: B.J12.6 7.48,25.39 | 8.14,26.05 14.89,26.05 15.19,25.75 B.U11A.14 15.19,25.67 15.63,26.12 19.98,26.12 | B.J14.1 20.31,21.67 | 16.71,11.01 13.27,11.01 12.69,11.59 B.J13.4 | B.J11.4 24.51,12.69 23.97,12.16 17.58,12.16 | B.J1.6 31.48,25.39 | 32.14,26.05 38.89,26.05 39.19,25.75 B.U11B.14 39.19,25.67 39.63,26.12 43.98,26.12 | B.J3.1 44.31,21.67 | 40.71,11.01 37.27,11.01 36.69,11.59 B.J2.4 | B.J4.4 48.51,12.69 47.97,12.16 41.58,12.16 | B.J5.6 55.48,25.39 | 56.14,26.05 62.89,26.05 63.19,25.75 B.U11C.14 63.19,25.67 63.63,26.12 67.98,26.12 | B.J7.1 68.31,21.67 | 64.71,11.01 61.27,11.01 60.69,11.59 B.J6.4 | B.J8.4 72.51,12.69 71.97,12.16 65.58,12.16
  Top 0.61: 7.48,25.39 8.14,26.05 | 31.48,25.39 32.14,26.05 | 55.48,25.39 56.14,26.05
  Bottom 0.254: B.J13.4 13.51,12.69 14.72,11.47 16.62,11.47 21.61,16.45 21.61,20.08 21.38,20.31 B.J14.1 | B.J2.4 37.51,12.69 38.73,11.47 40.62,11.47 45.6,16.45 45.6,20.08 45.38,20.31 B.J3.1 | B.J6.4 61.51,12.69 62.73,11.47 64.62,11.47 69.61,16.45 69.61,20.08 69.38,20.31 B.J7.1
  other vias: 10.41,7.42 12.63,20.4 25.18,7.32 21.34,24.77 34.41,7.42 36.63,20.4 49.18,7.32 45.34,24.77 58.41,7.42 60.63,20.4 73.18,7.32 69.34,24.77 29.29,8.28 53.29,8.21 28.63,21.92 52.71,21.98
  pour Bottom (isolate 0.305): 6.5,26.5 6.5,6.5 74.48,6.5 74.48,26.5
  pour Top (isolate 0.305): 6.5,26.5 6.5,6.5 74.48,6.5 74.48,26.5
GND7  (via drill 0.35)
  Top 0.305: JP9.6 63.36,49.39 71.59,41.16 71.59,37.29 72.19,36.69 I.J1.4
  Top 0.61: JP9.6 55.45,49.39
  Bottom 0.305: N.C1.2 71.5,37.59 71.5,36.1 | 71.5,36.1 71.12,35.72 69.85,35.72 69.58,35.98 JP10.9 | I.J1.4 73.6,35.53 73.25,35.18 72.42,35.18 71.5,36.1
  other vias: 60.48,45.47 60.55,43.16
  pour Top (isolate 0.305): 54.47,50.5 74.5,50.5 74.5,30.5 54.47,30.5
  pour Bottom (isolate 0.305): 54.5,50.5 74.5,50.5 74.5,30.5 54.5,30.5
GND8
  Top 0.406: U$12.7 79.42,21.11 80.72,19.81 80.72,16.78 JP13.1
  pour Top (isolate 0.305): 78.7,26.42 90.38,26.42 90.38,14.25 78.7,14.25
  pour Bottom (isolate 0.305): 78.72,26.42 90.38,26.42 90.38,14.25 78.72,14.25
IN+
  Top 0.305: 37.66,64.64 37.72,64.69
  Top 0.813: D.LIPOL.2 33.94,73.14 35,72.07 35,69.96 35.96,69.01 37.12,69.01 37.47,68.65 37.47,67.8 D.R8.2 37.72,67.55 37.72,64.69 38.18,64.24 D.U3.7
IN-  (via drill 0.35)
  Top 0.305: 40.34,65.43 40.21,65.56 | 39.83,65.56 39.63,65.56 | 39.55,65.63 39.37,65.63 D.U3.8
  Top 0.813: v36.48,70.17 36.59,70.29 D.C6.2 38.4,69.53 39.35,68.58 39.35,67.82 D.R8.1 | D.R8.1 39.61,67.65 | v41.05,64.01 41.05,64.72 40.34,65.43 | D.R8.1 39.47,67.59 39.47,65.71 39.55,65.63 39.63,65.56 | 40.21,65.56 39.83,65.56
  Bottom 0.254: D.U4.9 33.91,68.65 33.91,69.09
  Bottom 0.305: 33.68,68.86 33.91,69.09 D.U4.10
  Bottom 0.813: D.T1.D 41.11,65.22 41.11,64.07 v41.05,64.01 | v36.48,70.17 36.22,70.17 34.91,68.86 33.68,68.86
N$1  (via drill 0.35)
  Top 0.254: v17.03,70.38 v15.43,70.38
  Top 0.305: v17.04,70.38 v17.03,70.38
  Bottom 0.254: U$1.B7 15.74,69.93 v15.43,70.38 | v17.04,70.38 16.74,70.08 U$1.A7 U1.4
N$2
  Bottom 0.254: U1.3 16.24,66.42 U$1.A6 16.24,70.66 16.78,71.19 17.38,71.19 17.85,70.72 17.85,70.04 17.25,69.44 17.25,68.61 U$1.B6
N$3
  Bottom 0.254: U$1.A5 15.24,67.55 14.02,66.33 13.52,66.33 C.R6.2
N$4
  Bottom 0.254: U$1.B5 18.24,67.28 18.95,66.57 23,66.57 C.R5.2
N$5
  Bottom 0.305: C.F2.2 23.68,63.1
  Bottom 0.508: 25.47,63.1 JP1.3
  Bottom 0.61: 25.47,63.1 23.68,63.1
N$6
  Bottom 0.61: C.F1.2 23.77,69.94 24.48,69.94 25.21,69.21 25.21,68.7 JP1.1
N$7
  Bottom 0.254: U1.9 19.89,64.71 P1.TP
N$8
  Bottom 0.254: U1.5 U1.6
N$9
  Bottom 0.61: D.U1.VOUT 45.49,69.66 46.08,70.25 D.L2.1
N$10
  Bottom 0.305: 18.58,59.16 D.U2.VOUT 18.56,59.14 20.29,59.14 D.L1.1
N$11
  Bottom 0.305: D.U2.SHDN 15.8,61.1 14.21,61.1 C.R3.1
N$12
  Top 0.305: C.U1.IO4 8.72,69.58 C.J2.5
N$13
  Top 0.305: C.U1.IO17 8.18,67.58 C.J2.4
N$14
  Top 0.305: C.U1.IO18 7.64,65.58 C.J2.3
N$15
  Bottom 0.305: 44.58,67.72 44.58,71.85 44.33,72.09 40.74,72.09 40.38,72.45 D.ON/OFF/RESET.P$5 D.ON/OFF/RESET.P$3
  Bottom 0.356: D.R7.2 43.57,64.21 43.57,65.68 D.U1.SHDN 43.59,66.73 44.58,67.72
N$16  (via drill 0.35)
  Top 0.305: D.R5.1 42.77,58.06 v42.77,59
  Bottom 0.305: U$2.B5 42.67,59.1 v42.77,59
N$17  (via drill 0.35)
  Top 0.305: v45.67,59 45.67,57.9 D.R2.1
  Bottom 0.305: U$2.A5 v45.67,59
N$18  (via drill 0.35)
  Top 0.305: v34.97,66.49 34.97,66.52 33.52,67.96 D.R3.2
  Bottom 0.254: D.U4.6 33.99,67.08
  Bottom 0.305: 34.96,66.48 v34.97,66.49 34.97,66.66 34.55,67.09 D.U4.6
N$19
  Bottom 0.305: D.R9.2 34.98,55.84 32.59,58.23 32.59,67.56 33.12,68.09 D.U4.8
N$20
  Bottom 0.305: D.J2.5 31.59,71.04 36.93,71.04 37.36,70.62 37.36,69.82 35.83,68.29 35.83,64.93 D.T2.S
N$21
  Bottom 0.61: JP3.5 56.8,70.92 55.36,70.86 JP2.5
N$22
  Bottom 0.61: JP3.4 55.39,68.25 JP2.4
N$24
  Bottom 0.61: JP3.3 55.67,65.77 55.36,65.76 JP2.3
N$25
  Bottom 0.61: JP3.2 55.67,63.23 55.36,63.22 JP2.2
N$27
  Bottom 0.61: JP3.1 55.65,60.69 JP2.1
N$28
  Bottom 0.61: JP11.5 73.64,58.16 73.64,58.17 JP4.5
N$29
  Bottom 0.61: JP11.2 72.14,65.78 JP4.2
N$30
  Bottom 0.61: JP4.1 JP11.1
N$31
  Top 0.356: JP11.3 73.64,63.24
  Bottom 0.61: JP11.3 | JP4.3 JP11.3
N$32
  Top 0.305: L.R1.1 45.6,46.65 45.01,46.65 | L.R2.2 43.48,46.65 45.01,46.65 | 45.01,46.65 45.01,42.14 46.19,40.94 L.SW1.5
N$33
  Top 0.305: L.R2.1 43.21,48.38 42.09,48.38 | 42.09,48.38 40.92,48.38 L.R3.2 | 42.09,48.38 42.09,46.32 44.33,44.1 44.33,39.38 L.SW1.6
N$34
  Top 0.305: L.SW1.3 34.57,38.64 36.58,40.65 36.58,45.97 37.54,46.93 L.R4.2 L.R3.1
N$35
  Top 0.305: L.SW1.2 34.67,40.94 35.87,42.14 35.87,46.57 L.R5.2
N$36
  Top 0.254: 34.4,43.72 34.4,43.75 L.SW1.1
  Top 0.305: L.SW1.1 34.35,43.74 31.4,46.7 G.J1.5 | L.R6.1 34.39,33.35 32.92,34.83 32.92,42.24 34.4,43.72
N$37
  Top 0.305: L.R4.1 38.26,48.64 38.23,48.68 38.22,48.63 L.R5.1
N$38
  Bottom 0.305: JP5.5 7.4,46.52 8.99,44.93 8.99,43.31 11.48,40.82 K.R3.1
N$39
  Top 0.305: K.R6.2 11.68,48.59 JP5.4
  Bottom 0.305: JP5.4 7.4,43.73 11.35,39.78 15.06,39.78 K.R2.2 16.48,40.8 K.R4.1
N$40
  Bottom 0.305: K.R4.2 20.02,41.18 21.15,42.31 21.15,43.88 20.36,44.67 19.34,44.67 J1.5
N$41
  Bottom 0.305: J1.4 16.9,43.07 14.65,40.82 K.R3.2
N$42
  Bottom 0.305: K.R5.2 12.3,49.18 J1.3
N$43
  Bottom 0.305: J1.2 13.74,43.07 11.4,45.41 K.R1.2
N$44
  Top 0.305: B.U11A.7 9.99,15.87 B.R12A.2
N$45  (via drill 0.35)
  Top 0.305: B.U11A.6 11.7,18.91 v11.94,18.68 | v17.38,23.33 17.38,24.68 B.R11A.2
  Bottom 0.305: v11.94,18.68 12.43,18.68 17.08,23.33 v17.38,23.33
N$46
  Top 0.254: B.T11A.G 19.38,13.79 17.6,13.79 B.R13A.1 17.38,14.01 12.01,14.01 11.47,14.55 11.47,15.73 13.18,17.44 14.98,17.44 B.U11A.8
N$47
  Top 0.305: B.U11C.7 57.99,15.87 B.R12C.2
N$48
  Top 0.254: B.C11A.1 23.12,15.08 | B.C11B.1 47.12,15.08 | B.C11C.1 71.12,15.08
  Top 0.508: B.R14A.1 23.27,15.23 B.C11A.1 | B.R14B.1 47.27,15.23 B.C11B.1 | B.R14C.1 71.27,15.23 B.C11C.1
  Top 0.61: 23.12,15.08 25.45,15.08 B.J11.3 | B.C11A.1 22.54,15 21.28,13.74 B.T11A.S | 47.12,15.08 49.45,15.08 B.J4.3 | B.C11B.1 46.53,15 45.28,13.74 B.T11B.S | 71.12,15.08 73.45,15.08 B.J8.3 | B.C11C.1 70.53,15 69.28,13.74 B.T11C.S
  Bottom 0.61: B.J11.3 27.02,15.23 27.64,14.61 27.64,10.75 28.69,9.71 32.85,9.71 33.92,8.64 41.88,8.64 48.47,15.23 B.J4.3 51.02,15.23 51.62,14.64 51.62,10.78 52.69,9.71 56.85,9.71 57.92,8.64 65.88,8.64 72.47,15.23 B.J8.3
N$49
  Top 0.305: B.U11B.7 33.99,15.87 B.R12B.2
N$50  (via drill 0.35)
  Top 0.305: B.U11B.6 35.7,18.91 v35.94,18.68 | v41.38,23.33 41.38,24.68 B.R11B.2
  Bottom 0.305: v35.94,18.68 36.43,18.68 41.08,23.33 v41.38,23.33
N$51
  Top 0.254: B.T11B.G 43.38,13.79 41.6,13.79 B.R13B.1 41.38,14.01 36.01,14.01 35.47,14.55 35.47,15.73 37.18,17.44 38.98,17.44 B.U11B.8
N$52  (via drill 0.35)
  Top 0.305: B.U11C.6 59.7,18.91 v59.94,18.68 | v65.38,23.33 65.38,24.68 B.R11C.2
  Bottom 0.305: v59.94,18.68 60.43,18.68 65.08,23.33 v65.38,23.33
N$53
  Top 0.254: B.T11C.G 67.38,13.79 65.6,13.79 B.R13C.1 65.38,14.01 60.01,14.01 59.47,14.55 59.47,15.73 61.18,17.44 62.98,17.44 B.U11C.8
N$54
  Bottom 0.406: U$11.2 JP8.1
N$55
  Top 0.406: U$11.1 89.58,71.3 88.16,69.88 88.16,68.12 89.58,66.7 JP8.2
N$56
  Bottom 0.406: U$11.4 JP6.2
N$57
  Bottom 0.406: 82.12,72.62 U$11.5 81.73,72.77 81.73,71.12 81.06,70.45 81.06,68.19 81.78,67.48 81.78,66.68 JP6.3
N$58
  Bottom 0.406: U$11.3 87.34,72.69 87.34,71.17 87.94,70.58 87.94,68.25 87.29,67.6 87.29,66.75 JP6.1
N$59
  Bottom 0.305: N.R4.2 61.62,46.43 67.04,41.01 JP10.8 65.72,38.37 65.72,36.65 65.69,36.62 65.69,35.26 N.R1.2
N$60
  Bottom 0.305: N.R5.2 60.93,44.27 64.5,40.71 JP10.6 63.28,38.47 63.28,35.68 63.29,35.67 N.R2.2 63.18,35.31
N$61
  Bottom 0.305: N.R7.2 57.53,39.82 59.29,39.82 JP10.2
N$62
  Bottom 0.305: N.R4.1 55.82,46.43 JP9.5
N$63
  Bottom 0.305: N.R5.1 55.44,44.27 JP9.4
N$64
  Bottom 0.305: N.R6.1 55.75,42.12 JP9.3
N$65
  Bottom 0.305: N.R7.1 57.15,38.24 56.51,38.24 55.53,39.23 JP9.2
N$66
  Bottom 0.305: N.R8.1 56.46,34.81 55.4,35.88 JP9.1
N$67
  Bottom 0.305: N.R8.2 57.62,36.51 57.88,36.77 59.04,36.77 JP10.1
N$68
  Bottom 0.305: 59.53,42.12 N.R6.2 61.06,42.12 61.96,41.21 JP10.4 60.74,38.47 N.R3.2
N$69
  Bottom 0.254: U$12.2 89.58,25.25
  Bottom 0.406: 89.58,25.25 JP14.1
N$70
  Top 0.406: U$12.1 89.58,20.36 88.28,19.06 88.28,16.97 89.58,15.68 JP14.2
N$71
  Bottom 0.406: U$12.4 JP12.2
N$72
  Bottom 0.406: 82.12,24.62 U$12.5 81.58,24.62 81.58,23.17 81.06,22.66 81.06,19.95 81.78,19.23 81.78,18.18 JP12.3 82,18.04
N$73
  Bottom 0.406: U$12.3 87.4,24.64 87.4,23.15 87.94,22.61 87.94,19.97 87.27,19.31 87.27,18.23 JP12.1
PA1  (via drill 0.35)
  Top 0.305: B.U11A.13 13.81,24 v12.58,22.76
  Bottom 0.305: v12.58,22.76 7.49,22.76 B.J12.5
PA2  (via drill 0.35)
  Top 0.305: B.U11A.4 8.93,21.45 7.78,20.31 B.J12.4 | B.R11A.1 18.94,23.41 v18.93,23.4
  Bottom 0.305: v18.93,23.4 18.93,23.47 18.23,24.17 15.37,24.17 13,21.8 8.89,21.8 B.J12.4
PA3
  Top 0.305: D.R1.2 35.68,59.15 D.D1.1
  Bottom 0.254: 34.52,61.85 D.T2.D
  Bottom 0.305: 34.66,60.23 D.R6.1 | 34.9,58.45 D.D1.1 34.66,58.77 D.R6.1 | D.T2.D 34.66,62.23 D.R6.1
PA4
  Top 0.305: B.U11A.5 9.97,20.2 9.13,20.2 7.4,18.47 B.J12.3 7.4,17.12 8.72,15.8 8.72,15.18 B.R12A.1
PA5  (via drill 0.35)
  Top 0.305: B.U11B.13 37.81,24 v36.58,22.76
  Bottom 0.305: v36.58,22.76 31.49,22.76 B.J1.5
PA6
  Top 0.356: D.U3.1 33.72,65.61 32.96,65.61 32.72,65.85 32.72,66.45 31.4,67.77 D.J2.4
PA7
  Top 0.305: D.J2.3 31.4,65.51
  Top 0.356: 31.4,65.51 32.69,64.22 33.8,64.22 D.U3.2
PA8  (via drill 0.35)
  Top 0.305: B.U11B.4 32.93,21.45 31.78,20.31 B.J1.4 | B.R11B.1 42.94,23.41 v42.93,23.4
  Bottom 0.305: v42.93,23.4 42.93,23.47 42.23,24.17 39.37,24.17 37,21.8 32.89,21.8 B.J1.4
PA9
  Top 0.305: B.U11B.5 33.97,20.2 33.13,20.2 31.4,18.47 B.J1.3 31.4,17.12 32.72,15.8 32.72,15.18 B.R12B.1
PA10  (via drill 0.35)
  Top 0.305: B.U11C.13 61.81,24 v60.58,22.76
  Bottom 0.305: v60.58,22.76 55.49,22.76 B.J5.5
PA11  (via drill 0.35)
  Top 0.305: B.U11C.4 56.93,21.45 55.78,20.31 B.J5.4 | B.R11C.1 66.94,23.41 v66.93,23.4
  Bottom 0.305: v66.93,23.4 66.93,23.47 66.23,24.17 63.37,24.17 61,21.8 56.89,21.8 B.J5.4
PA12
  Top 0.305: B.U11C.5 57.97,20.2 57.13,20.2 55.4,18.47 B.J5.3 55.4,17.12 56.72,15.8 56.72,15.18 B.R12C.1
PROG  (via drill 0.35)
  Top 0.305: C.U1.IO0 10.32,70.58 10.33,70.59 10.86,70.59 11.12,70.33 11.12,65.45 11.87,64.74 v12.35,64.74
  Bottom 0.254: U1.23 14.52,65.18 12.89,65.18 12.48,64.74 v12.35,64.74
RESET  (via drill 0.35)
  Top 0.305: C.U1.EN 20.49,59.58 19.09,58.19 16.59,58.19 14.09,60.68 v14.09,62.29
  Bottom 0.254: U1.19 14.49,63.15 14.16,63.15
  Bottom 0.305: 14.16,63.15 14.16,62.36 v14.09,62.29
RX  (via drill 0.35)
  Top 0.305: C.U1.TXD0 10.01,60.56 10.98,60.56 v12.35,61.95
  Bottom 0.254: U1.20 14.52,63.69 13.95,63.69 12.35,62.09 v12.35,61.95
SCL
  Top 0.305: C.U1.IO22 9.04,59.58 8.68,59.93 8.31,60.28 7.81,60.28 C.J2.1
  Bottom 0.254: C.R1.1 7.73,60.41 C.J2.1
SCL1
  Top 0.356: D.U3.4 32.41,61.7 D.J2.1
SCL2
  Top 0.305: B.U11A.12 16.51,22.73 16.87,22.37 17.55,22.37 19.04,20.88 19.04,19.03 B.J14.3 19.02,16.48 13.95,16.48 12.71,15.23 B.J13.2 | B.U11B.12 40.51,22.73 40.87,22.37 41.55,22.37 43.04,20.88 43.04,19.03 B.J3.3 43.02,16.48 37.95,16.48 36.71,15.23 B.J2.2 | B.J12.1 8.14,12.69 12.51,8.32 27.72,8.32 29.39,10 29.39,12.26 29.82,12.69 B.J1.1 32.14,12.69 36.51,8.32 51.72,8.32 53.39,10 53.39,12.26 53.83,12.69 B.J5.1 | B.U11C.12 64.51,22.73 64.87,22.37 65.55,22.37 67.04,20.88 67.04,19.03 B.J7.3 67.02,16.48 61.95,16.48 60.71,15.23 B.J6.2
  Bottom 0.305: B.J12.1 9.94,15.23 B.J13.2 | B.J1.1 33.94,15.23 B.J2.2 | B.J5.1 57.94,15.23 B.J6.2
SDA
  Top 0.305: C.U1.IO21 8.1,62.58 C.J2.2
  Bottom 0.254: C.R2.1 7.6,63.43 C.J2.2
SDA1
  Top 0.305: 33.81,62.98 D.U3.3
  Top 0.356: D.U3.3 31.9,62.97 31.78,62.85 D.J2.2
SDA2
  Top 0.305: B.U11A.11 16.62,21.45 B.J14.2 | B.U11B.11 40.62,21.45 B.J3.2 | B.J12.2 8.83,13.8 8.83,12.88 12.9,8.8 27.17,8.8 27.58,9.21 27.58,13.24 29.57,15.23 B.J1.2 32.83,13.8 32.83,12.88 36.9,8.8 51.17,8.8 51.58,9.21 51.58,13.24 53.57,15.23 B.J5.2 | B.U11C.11 64.62,21.45 B.J7.2
  Bottom 0.305: B.J14.2 17.77,20.18 16.48,18.89 16.48,17.71 15.24,16.48 14.66,16.48 13.94,15.75 | B.J12.2 8.65,15.23 9.89,16.48 13.21,16.48 13.94,15.75 | 13.94,15.75 13.94,13.98 B.J13.3 | B.J3.2 41.77,20.18 40.48,18.89 40.48,17.71 39.24,16.48 38.66,16.48 37.94,15.75 | B.J1.2 32.65,15.23 33.89,16.48 37.21,16.48 37.94,15.75 | 37.94,15.75 37.94,13.98 B.J2.3 | B.J7.2 65.77,20.18 64.47,18.89 64.47,17.71 63.24,16.48 62.66,16.48 61.94,15.75 | B.J5.2 56.65,15.23 57.89,16.48 61.21,16.48 61.94,15.75 | 61.94,15.75 61.94,13.98 B.J6.3
STAT1
  Bottom 0.305: D.U4.3 37.59,68.09 37.01,67.5 37.01,65.37 37.01,65.36 37.01,61.53 37.37,61.17 37.37,58.6 D.D1.2
TX  (via drill 0.35)
  Top 0.305: C.U1.RXD0 10.66,61.59 12.3,63.23 v12.35,63.32
  Bottom 0.254: U1.21 13.29,64.21 12.4,63.32 v12.35,63.32
UPDI
  Top 0.305: B.U11A.10 14.96,19.95 13.93,19.95 13.54,19.57 13.54,18.73 10.89,16.08 10.89,11.69 13.14,9.44 24.89,9.44 B.J11.5
UPDI1
  Top 0.305: B.U11B.10 38.96,19.95 37.92,19.95 37.54,19.57 37.54,18.73 34.89,16.08 34.89,11.69 36.43,10.15 B.J4.5
UPDI2
  Top 0.305: B.U11C.10 62.96,19.95 61.92,19.95 61.54,19.57 61.54,18.73 58.89,16.08 58.89,11.69 61.14,9.44 72.89,9.44 B.J8.5
VBAT
  Bottom 0.61: B.J11.2 27.2,17.77 28.53,16.44 28.53,11.19 29.23,10.49 33.37,10.49 34.28,9.58 41.41,9.58 B.J4.2 51.2,17.77 52.53,16.44 52.53,11.19 53.23,10.49 57.37,10.49 58.28,9.58 65.41,9.58 B.J8.2
VBATF
  Top 0.813: D.J3.2 48.46,66.91 47.5,66.91 D.F2.2
VCC  (via drill 0.35)
  Top 0.406: 23,58.56 C.U1.3V3 | 24.45,59.13 v24.47,59.13 24.47,58.99 24.96,58.5 C.C1.1
  Top 0.508: C.U1.3V3 23.95,58.58 24.47,59.09 v24.47,59.13
  Bottom 0.254: 9.98,58.38 C.R1.2 | 10.01,61.72 C.R2.2
  Bottom 0.305: 24.54,58.19 24.24,58.49 19.69,58.49 19.39,58.19 11.44,58.19 10.93,58.71 | C.F2.1 23.38,60.71 23.7,60.38 | C.R1.2 10.93,58.71 | 10.93,58.71 10.89,58.74 10.89,61.04 10.57,61.37 10.38,61.37 C.R2.2
  Bottom 0.508: 24.54,58.19 24.54,57.78 C.C3.1 24.51,57.81 24.51,59.09 v24.47,59.13 23.7,59.89 23.7,60.38 | 23.07,61.21 C.F2.1
  Bottom 0.61: 23.07,61.21 22.52,61.21 21.24,62.49 D.L1.2 20.65,62.49 19.2,61.04 18.56,61.04 D.U2.BP
VCC1  (via drill 0.35)
  Top 0.254: D.C1.2 42.14,61.07 42.22,60.99
  Top 0.305: D.R4.1 40.21,56.23 39.92,56.23 39.14,57 v39.02,57 39.35,57.33 39.35,59.26 40.92,60.84 D.C1.2 42.01,61.07 | 41.32,68.89 v41.07,69.14
  Top 0.356: D.C1.2 40.88,61.11
  Top 0.61: D.C1.2 40.7,61.3 40.31,61.3 39.88,61.72 39.26,61.72 D.U3.5 | 41.99,68.89 v41.94,68.91 | 42.22,60.99 42.12,60.99
  Top 0.813: 41.99,68.89 42.19,68.7 42.19,61.09 40.95,61.09 D.C1.2 | D.F1.1 44.44,61.07 42.01,61.07 | v41.94,68.91 41.32,68.89
  Bottom 0.305: v39.02,57 38.97,56.95 34.84,56.95 33.36,58.43 33.36,64.36 D.T2.G
  Bottom 0.356: v41.94,68.91 41.94,68.89
  Bottom 0.61: D.L2.2 43.28,69.96 43.59,69.65 D.U1.BP | 42.81,71 D.L2.2 | D.C7.2 41.91,70.9 41.89,70.87 | 41.89,70.87 42.94,70.87 D.L2.2 | 41.81,70.79 41.89,70.87
  Bottom 0.813: 41.81,70.79 41.81,68.89 41.32,68.89 v41.07,69.14
VCC2
  Top 0.305: L.R6.2 45.9,33.35 48.3,35.75 48.3,38.21 49.32,39.23 G.J2.3
  Bottom 0.305: G.J2.3 49.09,38.72 L.C1.2
VCC3  (via drill 0.35)
  Top 0.305: K.R6.1 19.79,48.59 v20.25,48.14
  Bottom 0.305: K.C1.1 23.04,41.19 23.64,41.19 I.J3.3 | K.R2.1 20.54,39.58 22.13,41.16 22.41,41.16 K.C1.1 | v20.25,48.14 22.74,45.65 K.C1.1
VCC4  (via drill 0.35)
  Top 0.254: B.T11A.D 20.07,15.43 | B.J13.1 15.43,15.43
  Top 0.508: B.U11A.1 11.93,25.27 v12.27,24.92 | B.T11A.D 21.09,15.69 21.81,16.41 21.81,17.94 22.44,18.57 22.99,18.57 B.R14A.2
  Top 0.61: 20.07,15.43 15.43,15.43
  Bottom 0.356: 19.04,19.65 19.04,21.04
  Bottom 0.508: B.J13.1 B.J14.4 17.77,18.38 19.04,19.65 | v12.27,24.92 v12.28,24.93 18.93,24.93 19.89,23.96 19.89,21.89 19.04,21.04
VCC5  (via drill 0.35)
  Top 0.254: B.T11B.D 44.07,15.43 | B.J2.1 39.43,15.43
  Top 0.508: B.U11B.1 35.93,25.27 v36.27,24.92 | B.T11B.D 45.09,15.69 45.81,16.41 45.81,17.94 46.44,18.57 46.99,18.57 B.R14B.2
  Top 0.61: 44.07,15.43 39.43,15.43
  Bottom 0.356: 43.04,19.65 43.04,21.04
  Bottom 0.508: B.J2.1 B.J3.4 41.77,18.38 43.04,19.65 | v36.27,24.92 v36.28,24.93 42.92,24.93 43.89,23.96 43.89,21.89 43.04,21.04
VCC6  (via drill 0.35)
  Top 0.254: B.T11C.D 68.07,15.43 | B.J6.1 63.43,15.43
  Top 0.508: B.U11C.1 59.93,25.27 v60.27,24.92 | B.T11C.D 69.09,15.69 69.81,16.41 69.81,17.94 70.44,18.57 70.99,18.57 B.R14C.2
  Top 0.61: 68.07,15.43 63.43,15.43
  Bottom 0.356: 67.04,19.65 67.04,21.04
  Bottom 0.508: B.J6.1 B.J7.4 65.77,18.38 67.04,19.65 | v60.27,24.92 v60.28,24.93 66.92,24.93 67.89,23.96 67.89,21.89 67.04,21.04
VCC7
  Bottom 0.813: U$11.6 JP7.2
VCC8
  Bottom 0.305: N.R3.1 60.75,33.5 N.R2.1 N.R1.1 68.36,36.11 68.36,38.49 69.56,39.69 JP10.10
  Bottom 0.813: I.J1.3 71.56,39.23 N.C1.1 69.95,39.32 JP10.10
VCC9
  Bottom 0.813: U$12.6 JP13.2
VMOT  (via drill 0.35)
  Top 0.813: D.F2.1 47.22,65.21 v47.22,63.88 45.39,63.88 D.D2.K
  Bottom 0.305: D.U1.VIN 45.64,65.55
  Bottom 0.356: 45.69,65.51 45.5,65.7 D.U1.VIN
  Bottom 0.61: 45.62,64.21 D.R7.1
  Bottom 0.813: D.R7.1 45.4,63.99 45.4,63.22 44.95,62.76 42.94,62.76 42.48,63.22 42.48,66.66 42.08,67.06 D.T1.S | v47.22,63.88 47.09,64.01 45.82,64.01 45.64,64.19 45.64,65.55 | v47.22,63.88 45.96,63.88 45.62,64.21 | D.C2.2 47.12,63.98 v47.22,63.88
VUSB  (via drill 0.35)  (4 unrouted)
  Top 0.508: v20.83,67.98 20.83,67.94 v20.83,65.78 20.83,62.2 17.66,59.05 v17.17,59.05
  Top 0.61: v19.43,71.81 19.43,71.79 20.83,70.39 v20.83,67.98
  Bottom 0.254: 15.78,59.23 D.U2.VIN | C.F1.1 23.13,67.98 | 18.26,65.66 18.89,65.66
  Bottom 0.305: 14.04,67.67 14.04,67.68 U$1.A4B9 | D.U2.VIN 14.2,59.16 C.R3.2 | 18.2,65.28 18.2,65.51
  Bottom 0.508: 18.3,65.56 19.16,65.56 19.39,65.78 v20.83,65.78 | v17.17,59.05 17.1,59.12 15.88,59.12 D.U2.VIN
  Bottom 0.61: 20.84,67.99 v20.83,67.98 20.83,67.84 20.3,67.31 19.19,67.31 18.94,67.56 U$1.B4A9 | 14.04,67.84 14.04,67.67 14.04,67.57 13.76,67.29 10.01,67.29 C.C5.2 9.8,67.5 9.8,70.42 11.28,71.9 19.34,71.9 v19.43,71.81
  Bottom 0.813: 20.84,67.98 v20.83,67.98 23.13,67.98
VUSB1  (via drill 0.35)
  Top 0.813: D.J3.1 49.3,68.61 45.76,68.61 44.95,67.81 44.95,67.58 | 44.95,67.58 D.D2.A | v47.12,62.3 43.92,62.3 43.46,62.76 43.46,66.09 44.95,67.58
  Bottom 0.305: D.U4.2 38.38,68.6 | 38.33,69.09 D.U4.1 | D.U4.1 38.38,68.81 37.37,68.81 36.4,67.84 36.4,60.39 D.R6.2 | D.U4.2 38.63,68.84 | 38.38,68.8 38.38,68.79 | 38.38,68.79 38.38,68.6 | 38.38,68.6 D.U4.2 | D.U4.1 38.38,68.79
  Bottom 0.356: 39.65,65.13 D.C4.2
  Bottom 0.508: 41.97,60.52 41.97,61.5 | 41.98,61.78 46.73,61.78
  Bottom 0.61: 39.77,64.07 D.C4.2 39.67,63.92 | D.T1.G 40.18,67.57 | v47.12,62.3 46.86,62.3 | 41.97,61.91 41.97,61.76 | U$2.B4A9 41.97,61.5 41.97,61.76 | 41.97,61.76 41.98,61.78 | 46.73,61.78 46.86,61.64 46.87,61.63 U$2.A4B9
  Bottom 0.813: 39.7,63.8 D.C4.2 | 46.86,62.3 46.86,61.64 | 41.97,61.91 41.11,62.77 39.98,62.77 39.75,62.99 39.75,63.75 D.C4.2 | D.C4.2 39.84,64.05 39.84,66.67 40.18,67.01 D.T1.G 40.18,68.22 39.56,68.84 38.63,68.84 | v46.15,62.31 v47.12,62.31 v47.12,62.3
VUSB2
  Bottom 0.61: B.J11.1 27.17,20.31 29.39,18.09 29.39,11.69 29.79,11.29 33.93,11.29 34.73,10.49 40.85,10.49 48.02,17.67 48.02,18.51 49.6,20.09 B.J4.1 51.17,20.31 53.39,18.09 53.39,11.69 53.79,11.29 57.93,11.29 58.73,10.49 64.85,10.49 72.03,17.67 72.03,18.51 73.6,20.09 B.J8.1

## Text on the board
tPlace: + | − | power M4 | proto | M.4 | meteo / M.4 | connector M.4 | 5wSwitch M4
bPlace: main M.4 | GND | GND | GND | PA3 | PA3 | PA3 | PA6 | VUSB | PA6 | VUSB | PA6 | VUSB | PA7 | VBAT | PA7 | VBAT | PA7 | VBAT | SDA | 3V3 | SDA | 3V3 | SDA | 3V3 | SCL | GND | SCL | GND | SCL | GND | UPDI | UPDI | UPDI | adapter 414 M.4 | adapter 414 M.4 | adapter 414 M.4
tNames: Hugo M4